# EAGLE board A3PDF1 (EAGLE 9.7.0)

Size 484.1 x 763.69 mm. Coordinates in mm from the lower left corner, seen from the top.
Outline: 0,0 484.1,0 484.1,763.69 0,763.69 0,0
Copper layers (1*16): Top 0.035mm / dielectric 1.5mm / Bottom 0.035mm
Design rules "default": minimum track width 6mil, minimum drill 0.35mm, track to track 6mil, track to pad 6mil, pad to pad 6mil, via to via 6mil, smd to smd 6mil, copper to edge 40mil, drill to drill 6mil, minimum pad ring 10mil, minimum via ring 8mil, stop-mask expansion 4mil, vias tented up to drill 0mil, thermal gap 10mil

## Footprints (pad centres in the part's own frame; a part is rotated, then mirrored left to right if it is on the bottom)
LEDRD254W60D565H860B = drill 0.981 pad 1.581: 1 -1.27,0; 2 1.27,0
LEDRD254W60D565H860B_G = drill 0.981 pad 1.581: 1 -1.27,0; 2 1.27,0
LEDRD254W60D565H860B_Y = drill 0.981 pad 1.581: 1 -1.27,0; 2 1.27,0
LED-RGB-5MM = drill 0.9: B 0.635,0.635; C -0.635,-0.635; G 1.905,-0.635; R -1.905,0.635
RESAD1016W63L850D250B = drill 0.83 pad 1.43: 1 -5.08,0; 2 5.08,0
GL5528 = drill 0.8 pad 1.4: 1 -1.702,0; 2 1.702,0
ARDUINO-UNO-R3-SHIELD = drill 1.016 pad 1.88: 3.3V 24.13,-2.54; 5V 24.13,0; A0 24.13,12.7; A1 24.13,15.24; A2 24.13,17.78; A3 24.13,20.32; A4 24.13,22.86; A5 24.13,25.4; AREF -24.13,-13.97; D2 -24.13,20.32; D3 -24.13,17.78; D4 -24.13,15.24; D5 -24.13,12.7; D6 -24.13,10.16; D7 -24.13,7.62; D8 -24.13,3.81; D9 -24.13,1.27; D10 -24.13,-1.27; D11 -24.13,-3.81; D12 -24.13,-6.35; D13 -24.13,-8.89; GND@0 24.13,2.54; GND@1 24.13,5.08; GND@2 -24.13,-11.43; IOREF 24.13,-7.62; NC 24.13,-10.16; RES 24.13,-5.08; RX -24.13,25.4; SCL -24.13,-19.05; SDA -24.13,-16.51; TX -24.13,22.86; VIN 24.13,7.62

## Placement (x,y rotation side)
D1  RED  [LEDRD254W60D565H860B]  466.62,710.35 180 top
D2  RED  [LEDRD254W60D565H860B]  461.26,526.18 180 top
D3  GREEN  [LEDRD254W60D565H860B_G]  476.5,526.18 180 top
D4  GREEN  [LEDRD254W60D565H860B_G]  461.26,518.56 180 top
D5  RED  [LEDRD254W60D565H860B]  89.98,529 180 top
D6  GREEN  [LEDRD254W60D565H860B_G]  89.98,521.38 180 top
D7  RED  [LEDRD254W60D565H860B]  462.87,372.01 180 top
D8  GREEN  [LEDRD254W60D565H860B_G]  467.95,372.01 180 top
D9  RED  [LEDRD254W60D565H860B]  92.72,376.45 180 top
D10  YELLOW  [LEDRD254W60D565H860B_Y]  97.8,376.45 180 top
D11  GREEN  [LEDRD254W60D565H860B_G]  102.88,376.45 180 top
D12  RED  [LEDRD254W60D565H860B]  95.18,191.26 180 top
D13  LED-RGBRCBG-PTH  [LED-RGB-5MM]  473.12,200.03 0 top
D14  RED  [LEDRD254W60D565H860B]  116.19,56.66 180 top
D15  RED  [LEDRD254W60D565H860B]  126.35,56.66 180 top
R1  220  [RESAD1016W63L850D250B]  467.89,695.11 90 top
R2  220  [RESAD1016W63L850D250B]  462.53,510.94 90 top
R3  220  [RESAD1016W63L850D250B]  477.77,510.94 90 top
R4  220  [RESAD1016W63L850D250B]  91.25,541.7 270 top
R5  220  [RESAD1016W63L850D250B]  91.25,506.14 90 top
R6  220  [RESAD1016W63L850D250B]  464.14,364.39 90 top
R7  220  [RESAD1016W63L850D250B]  469.22,364.39 90 top
R8  220  [RESAD1016W63L850D250B]  93.99,368.83 90 top
R9  220  [RESAD1016W63L850D250B]  99.07,368.83 90 top
R10  220  [RESAD1016W63L850D250B]  104.15,368.83 90 top
R11  220  [RESAD1016W63L850D250B]  96.45,176.02 90 top
R12  220  [RESAD1016W63L850D250B]  469.31,192.41 90 top
R13  220  [RESAD1016W63L850D250B]  474.39,192.41 90 top
R14  220  [RESAD1016W63L850D250B]  476.93,192.41 90 top
R15  10k  [RESAD1016W63L850D250B]  468.18,27.65 0 top
R16  PHOTOCELL_GL5528  [GL5528]  474.53,32.73 0 top
R17  10k  [RESAD1016W63L850D250B]  97.14,38.88 0 top
R18  PHOTOCELL_GL5528  [GL5528]  103.49,43.96 0 top
R19  220  [RESAD1016W63L850D250B]  117.46,49.04 90 top
R20  220  [RESAD1016W63L850D250B]  127.62,49.04 90 top
U1  ARDUINO-UNO-R3-SHIELD  [ARDUINO-UNO-R3-SHIELD]  71.25,733.85 270 top
U2  ARDUINO-UNO-R3-SHIELD  [ARDUINO-UNO-R3-SHIELD]  401.29,709.23 180 top
U3  ARDUINO-UNO-R3-SHIELD  [ARDUINO-UNO-R3-SHIELD]  395.93,525.06 180 top
U4  ARDUINO-UNO-R3-SHIELD  [ARDUINO-UNO-R3-SHIELD]  32.27,520.26 180 top
U5  ARDUINO-UNO-R3-SHIELD  [ARDUINO-UNO-R3-SHIELD]  34.74,364.08 180 top
U6  ARDUINO-UNO-R3-SHIELD  [ARDUINO-UNO-R3-SHIELD]  405.29,360.52 180 top
U7  ARDUINO-UNO-R3-SHIELD  [ARDUINO-UNO-R3-SHIELD]  29.84,190.32 180 top
U8  ARDUINO-UNO-R3-SHIELD  [ARDUINO-UNO-R3-SHIELD]  400.17,189.11 180 top
U9  ARDUINO-UNO-R3-SHIELD  [ARDUINO-UNO-R3-SHIELD]  406.66,34.52 180 top
U10  ARDUINO-UNO-R3-SHIELD  [ARDUINO-UNO-R3-SHIELD]  36.17,45.6 180 top

## Library data of the parts
D1 D2 D5 D7 D9 D12 D14 D15 = Tinkercad; CATEGORY: Opto-Electronic; SUB-CATEGORY: LED; VALUE: LED_RED
D3 D4 D6 D8 D11 = Tinkercad; CATEGORY: Opto-Electronic; SUB-CATEGORY: LED; VALUE: LED_GREEN
D10 = Tinkercad; CATEGORY: Opto-Electronic; SUB-CATEGORY: LED; VALUE: LED_YELLOW
D13 R1-R20 U1-U10 = Tinkercad

## Nets
D1_A: D1.1 R1.2
D2_A: D2.1 D4.1 R2.2
D3_A: D3.1 R3.2
D5_A: D5.1 R4.2
D6_A: D6.1 R5.2
D7_A: D7.1 R6.2
D8_A: D8.1 R7.2
D9_A: D9.1 R8.2
D10_A: D10.1 R9.2
D11_A: D11.1 R10.2
D12_A: D12.1 R11.2
D13_B: D13.B R13.2
D13_G: D13.G R14.2
D13_R: D13.R R12.2
D14_A: D14.1 R19.2
D15_A: D15.1 R20.2
U2_D13: R1.1 U2.D13
U2_GND: D1.2 U2.GND@0 U2.GND@1 U2.GND@2
U3_D12: R2.1 R3.1 U3.D12
U3_GND: D2.2 D3.2 D4.2 U3.GND@0 U3.GND@1 U3.GND@2
U4_D12: R5.1 U4.D12
U4_D13: R4.1 U4.D13
U4_GND: D6.2 U4.GND@0 U4.GND@1 U4.GND@2
U5_D11: R10.1 U5.D11
U5_D12: R9.1 U5.D12
U5_D13: R8.1 U5.D13
U5_GND: D9.2 D10.2 D11.2 U5.GND@0 U5.GND@1 U5.GND@2
U6_D12: R7.1 U6.D12
U6_D13: R6.1 U6.D13
U6_GND: D7.2 D8.2 U6.GND@0 U6.GND@1 U6.GND@2
U7_D11: R11.1 U7.D11
U7_GND: D12.2 U7.GND@0 U7.GND@1 U7.GND@2
U8_D9: R14.1 U8.D9
U8_D10: R13.1 U8.D10
U8_D11: R12.1 U8.D11
U8_GND: D13.C U8.GND@0 U8.GND@1 U8.GND@2
U9_5V: R15.1 U9.5V
U9_A0: R15.2 R16.1 U9.A0
U9_GND: R16.2 U9.GND@0 U9.GND@1 U9.GND@2
U10_5V: R17.1 U10.5V
U10_A0: R17.2 R18.1 U10.A0
U10_D12: R20.1 U10.D12
U10_D13: R19.1 U10.D13
U10_GND: D14.2 D15.2 R18.2 U10.GND@0 U10.GND@1 U10.GND@2

## Tracks (layer width: path | path; a pad name or v marks a point on that pad's centre or on a via)
D1_A  (1 unrouted)
D2_A  (2 unrouted)
D3_A  (1 unrouted)
D5_A  (1 unrouted)
D6_A  (1 unrouted)
D7_A  (1 unrouted)
D8_A  (1 unrouted)
D9_A  (1 unrouted)
D10_A  (1 unrouted)
D11_A  (1 unrouted)
D12_A  (1 unrouted)
D13_B  (1 unrouted)
D13_G  (1 unrouted)
D13_R  (1 unrouted)
D14_A  (1 unrouted)
D15_A  (1 unrouted)
U2_D13  (1 unrouted)
U2_GND  (3 unrouted)
U3_D12  (2 unrouted)
U3_GND  (5 unrouted)
U4_D12  (1 unrouted)
U4_D13  (1 unrouted)
U4_GND  (3 unrouted)
U5_D11  (1 unrouted)
U5_D12  (1 unrouted)
U5_D13  (1 unrouted)
U5_GND  (5 unrouted)
U6_D12  (1 unrouted)
U6_D13  (1 unrouted)
U6_GND  (4 unrouted)
U7_D11  (1 unrouted)
U7_GND  (3 unrouted)
U8_D9  (1 unrouted)
U8_D10  (1 unrouted)
U8_D11  (1 unrouted)
U8_GND  (3 unrouted)
U9_5V  (1 unrouted)
U9_A0  (2 unrouted)
U9_GND  (3 unrouted)
U10_5V  (1 unrouted)
U10_A0  (2 unrouted)
U10_D12  (1 unrouted)
U10_D13  (1 unrouted)
U10_GND  (5 unrouted)